# EAGLE board smd_circuit_2x5 (EAGLE 5.11)
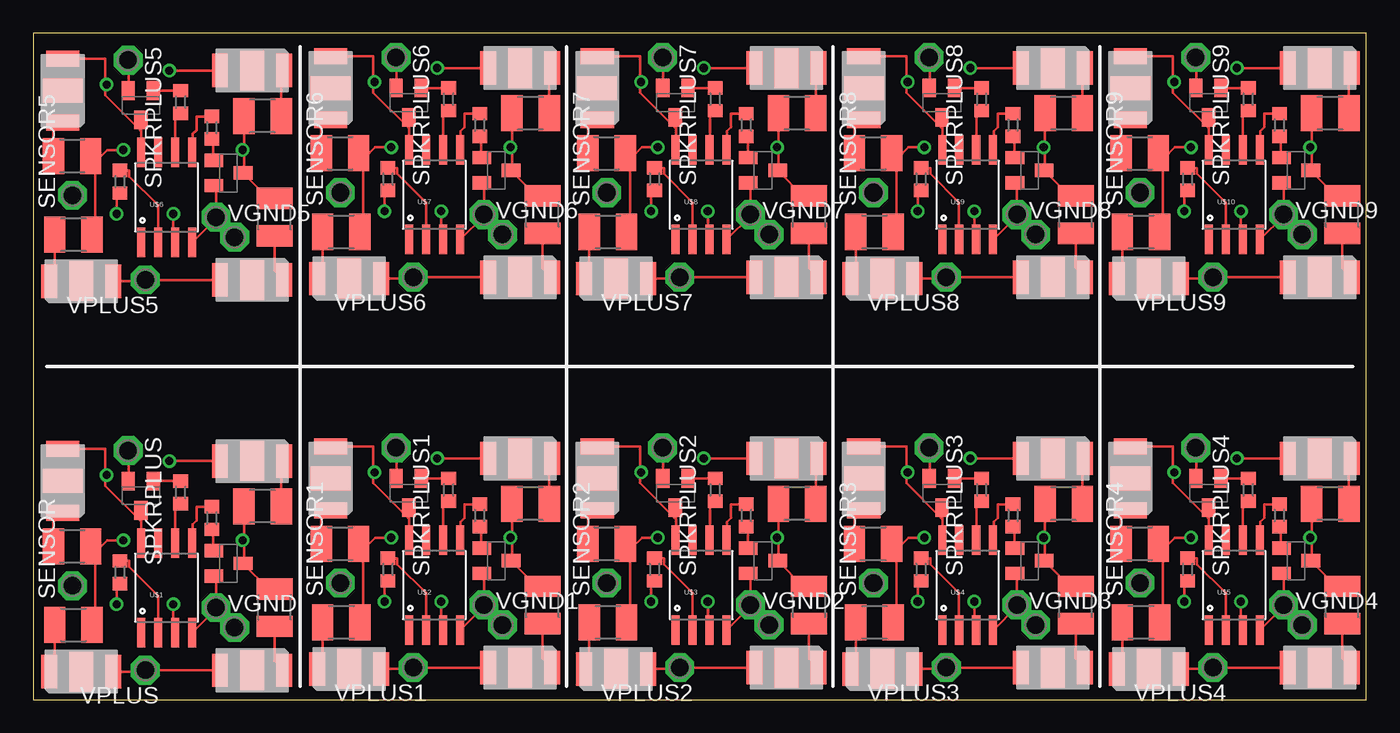
[diagram p0: board, top side]
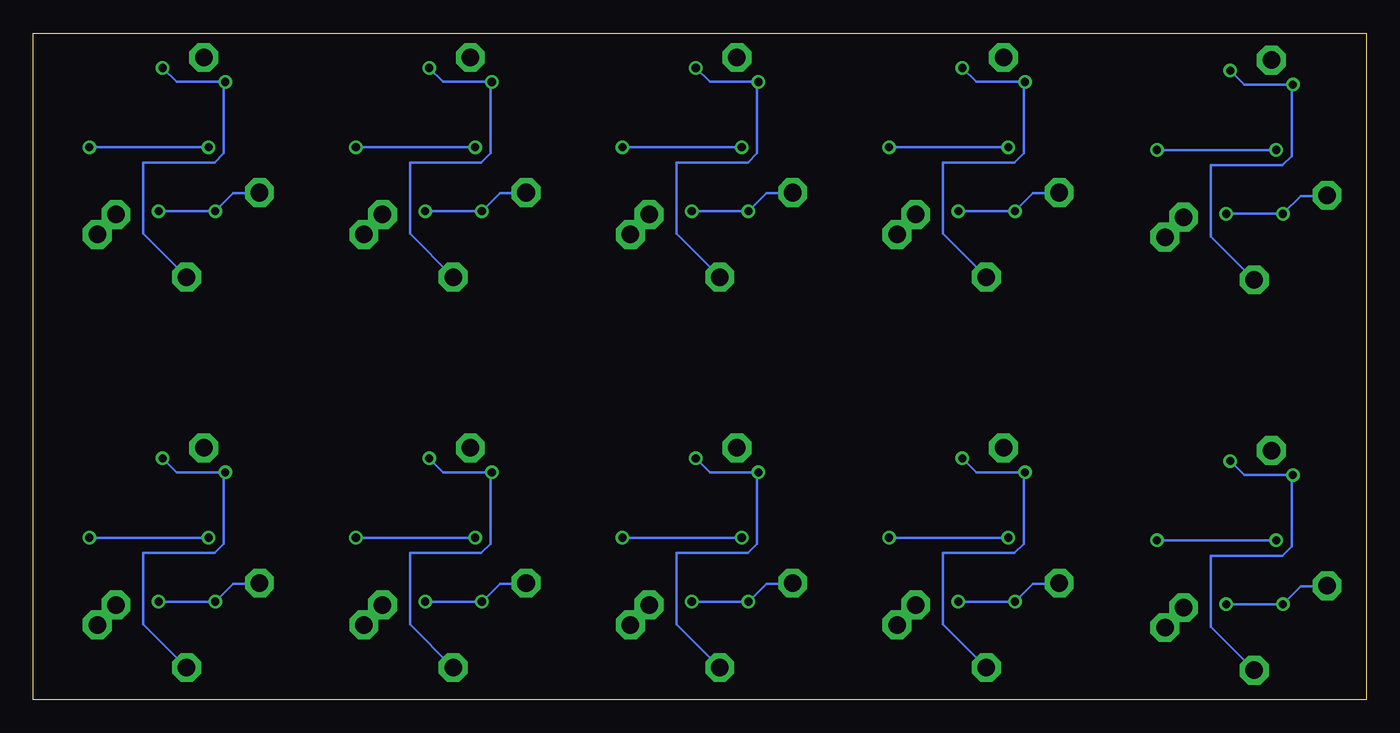
[diagram p1: board, bottom side, seen from below]

Size 100 x 50 mm. Coordinates in mm from the lower left corner, seen from the top.
Outline: 0,0 100,0 100,50 0,50 0,0
Copper layers (1*16): Top 0.035mm / dielectric 1.5mm / Bottom 0.035mm
Design rules "default *": minimum track width 8mil, minimum drill 24mil, track to track 20mil, track to pad 20mil, pad to pad 20mil, via to via 20mil, smd to smd 20mil, copper to edge 7mil, drill to drill 8mil, minimum pad ring 10mil, minimum via ring 8mil, stop-mask expansion 4mil, vias tented up to drill 0mil, thermal gap 10mil

## Footprints (pad centres in the part's own frame; a part is rotated, then mirrored left to right if it is on the bottom)
OPTEK-DURIS5 = smd 2.5 x 1.2: ANODE 0,-2.4; CATHODE 0,2.4 | smd 3 x 1.8: P$5 0,0
R0603 = smd 1 x 1.1: 1 -0.85,0; 2 0.85,0
R1210 = smd 1.6 x 2.7: 1 -1.4,0; 2 1.4,0
P1-13 = drill 1.321 pad 2.159 octagon: TP 0,0
SOT23-BEC = smd 1 x 1.4: B -0.95,-1.1; C 0,1.1; E 0.95,-1.1
SO08-EIAJ = smd 0.61 x 2.21: 1 -1.905,-3.378; 2 -0.635,-3.378; 3 0.635,-3.378; 4 1.905,-3.378; 5 1.905,3.353; 6 0.635,3.353; 7 -0.635,3.353; 8 -1.905,3.353

## Placement (x,y rotation side)
LED1  [OPTEK-DURIS5]  16.4,17.9 270 top
LED2  [OPTEK-DURIS5]  16.4,2.2 270 top
LED3  [OPTEK-DURIS5]  3.6,2.1 90 top
LED4  [OPTEK-DURIS5]  2.2,16.4 180 top
LED5  [OPTEK-DURIS5]  36.5,18.1 270 top
LED6  [OPTEK-DURIS5]  36.5,2.4 270 top
LED7  [OPTEK-DURIS5]  23.7,2.3 90 top
LED8  [OPTEK-DURIS5]  22.3,16.6 180 top
LED9  [OPTEK-DURIS5]  56.5,18.1 270 top
LED10  [OPTEK-DURIS5]  56.5,2.4 270 top
LED11  [OPTEK-DURIS5]  43.7,2.3 90 top
LED12  [OPTEK-DURIS5]  42.3,16.6 180 top
LED13  [OPTEK-DURIS5]  76.5,18.1 270 top
LED14  [OPTEK-DURIS5]  76.5,2.4 270 top
LED15  [OPTEK-DURIS5]  63.7,2.3 90 top
LED16  [OPTEK-DURIS5]  62.3,16.6 180 top
LED17  [OPTEK-DURIS5]  96.5,18.1 270 top
LED18  [OPTEK-DURIS5]  96.5,2.4 270 top
LED19  [OPTEK-DURIS5]  83.7,2.3 90 top
LED20  [OPTEK-DURIS5]  82.3,16.6 180 top
LED21  [OPTEK-DURIS5]  16.4,47.2 270 top
LED22  [OPTEK-DURIS5]  16.4,31.5 270 top
LED23  [OPTEK-DURIS5]  3.6,31.4 90 top
LED24  [OPTEK-DURIS5]  2.2,45.7 180 top
LED25  [OPTEK-DURIS5]  36.5,47.4 270 top
LED26  [OPTEK-DURIS5]  36.5,31.7 270 top
LED27  [OPTEK-DURIS5]  23.7,31.6 90 top
LED28  [OPTEK-DURIS5]  22.3,45.9 180 top
LED29  [OPTEK-DURIS5]  56.5,47.4 270 top
LED30  [OPTEK-DURIS5]  56.5,31.7 270 top
LED31  [OPTEK-DURIS5]  43.7,31.6 90 top
LED32  [OPTEK-DURIS5]  42.3,45.9 180 top
LED33  [OPTEK-DURIS5]  76.5,47.4 270 top
LED34  [OPTEK-DURIS5]  76.5,31.7 270 top
LED35  [OPTEK-DURIS5]  63.7,31.6 90 top
LED36  [OPTEK-DURIS5]  62.3,45.9 180 top
LED37  [OPTEK-DURIS5]  96.5,47.4 270 top
LED38  [OPTEK-DURIS5]  96.5,31.7 270 top
LED39  [OPTEK-DURIS5]  83.7,31.6 90 top
LED40  [OPTEK-DURIS5]  82.3,45.9 180 top
R1  [R0603]  13.4,13.61 270 top
R2  [R0603]  11.05,15.55 90 top
R3  [R0603]  6.51,9.56 90 top
R4  [R1210]  17.2,14.5 180 top
R5  [R1210]  18.1,6.9 90 top
R6  [R1210]  3,5.6 0 top
R7  [R1210]  2.9,11.5 0 top
R8  [R0603]  33.5,13.81 270 top
R9  [R0603]  31.15,15.75 90 top
R10  [R0603]  26.61,9.76 90 top
R11  [R1210]  37.3,14.7 180 top
R12  [R1210]  38.2,7.1 90 top
R13  [R1210]  23.1,5.8 0 top
R14  [R1210]  23,11.7 0 top
R15  [R0603]  53.5,13.81 270 top
R16  [R0603]  51.15,15.75 90 top
R17  [R0603]  46.61,9.76 90 top
R18  [R1210]  57.3,14.7 180 top
R19  [R1210]  58.2,7.1 90 top
R20  [R1210]  43.1,5.8 0 top
R21  [R1210]  43,11.7 0 top
R22  [R0603]  73.5,13.81 270 top
R23  [R0603]  71.15,15.75 90 top
R24  [R0603]  66.61,9.76 90 top
R25  [R1210]  77.3,14.7 180 top
R26  [R1210]  78.2,7.1 90 top
R27  [R1210]  63.1,5.8 0 top
R28  [R1210]  63,11.7 0 top
R29  [R0603]  93.5,13.81 270 top
R30  [R0603]  91.15,15.75 90 top
R31  [R0603]  86.61,9.76 90 top
R32  [R1210]  97.3,14.7 180 top
R33  [R1210]  98.2,7.1 90 top
R34  [R1210]  83.1,5.8 0 top
R35  [R1210]  83,11.7 0 top
R36  [R0603]  13.4,42.91 270 top
R37  [R0603]  11.05,44.85 90 top
R38  [R0603]  6.51,38.86 90 top
R39  [R1210]  17.2,43.8 180 top
R40  [R1210]  18.1,36.2 90 top
R41  [R1210]  3,34.9 0 top
R42  [R1210]  2.9,40.8 0 top
R43  [R0603]  33.5,43.11 270 top
R44  [R0603]  31.15,45.05 90 top
R45  [R0603]  26.61,39.06 90 top
R46  [R1210]  37.3,44 180 top
R47  [R1210]  38.2,36.4 90 top
R48  [R1210]  23.1,35.1 0 top
R49  [R1210]  23,41 0 top
R50  [R0603]  53.5,43.11 270 top
R51  [R0603]  51.15,45.05 90 top
R52  [R0603]  46.61,39.06 90 top
R53  [R1210]  57.3,44 180 top
R54  [R1210]  58.2,36.4 90 top
R55  [R1210]  43.1,35.1 0 top
R56  [R1210]  43,41 0 top
R57  [R0603]  73.5,43.11 270 top
R58  [R0603]  71.15,45.05 90 top
R59  [R0603]  66.61,39.06 90 top
R60  [R1210]  77.3,44 180 top
R61  [R1210]  78.2,36.4 90 top
R62  [R1210]  63.1,35.1 0 top
R63  [R1210]  63,41 0 top
R64  [R0603]  93.5,43.11 270 top
R65  [R0603]  91.15,45.05 90 top
R66  [R0603]  86.61,39.06 90 top
R67  [R1210]  97.3,44 180 top
R68  [R1210]  98.2,36.4 90 top
R69  [R1210]  83.1,35.1 0 top
R70  [R1210]  83,41 0 top
SENSOR  PTR1PAD1-13  [P1-13]  2.93,8.54 90 top
SENSOR1  PTR1PAD1-13  [P1-13]  23.03,8.74 90 top
SENSOR2  PTR1PAD1-13  [P1-13]  43.03,8.74 90 top
SENSOR3  PTR1PAD1-13  [P1-13]  63.03,8.74 90 top
SENSOR4  PTR1PAD1-13  [P1-13]  83.03,8.74 90 top
SENSOR5  PTR1PAD1-13  [P1-13]  2.93,37.84 90 top
SENSOR6  PTR1PAD1-13  [P1-13]  23.03,38.04 90 top
SENSOR7  PTR1PAD1-13  [P1-13]  43.03,38.04 90 top
SENSOR8  PTR1PAD1-13  [P1-13]  63.03,38.04 90 top
SENSOR9  PTR1PAD1-13  [P1-13]  83.03,38.04 90 top
SPKRGND  PTR1PAD1-13  [P1-13]  15.1,5.4 0 top
SPKRGND1  PTR1PAD1-13  [P1-13]  35.2,5.6 0 top
SPKRGND2  PTR1PAD1-13  [P1-13]  55.2,5.6 0 top
SPKRGND3  PTR1PAD1-13  [P1-13]  75.2,5.6 0 top
SPKRGND4  PTR1PAD1-13  [P1-13]  95.2,5.6 0 top
SPKRGND5  PTR1PAD1-13  [P1-13]  15.1,34.7 0 top
SPKRGND6  PTR1PAD1-13  [P1-13]  35.2,34.9 0 top
SPKRGND7  PTR1PAD1-13  [P1-13]  55.2,34.9 0 top
SPKRGND8  PTR1PAD1-13  [P1-13]  75.2,34.9 0 top
SPKRGND9  PTR1PAD1-13  [P1-13]  95.2,34.9 0 top
SPKRPLUS  PTR1PAD1-13  [P1-13]  7.11,18.69 270 top
SPKRPLUS1  PTR1PAD1-13  [P1-13]  27.21,18.89 270 top
SPKRPLUS2  PTR1PAD1-13  [P1-13]  47.21,18.89 270 top
SPKRPLUS3  PTR1PAD1-13  [P1-13]  67.21,18.89 270 top
SPKRPLUS4  PTR1PAD1-13  [P1-13]  87.21,18.89 270 top
SPKRPLUS5  PTR1PAD1-13  [P1-13]  7.11,47.99 270 top
SPKRPLUS6  PTR1PAD1-13  [P1-13]  27.21,48.19 270 top
SPKRPLUS7  PTR1PAD1-13  [P1-13]  47.21,48.19 270 top
SPKRPLUS8  PTR1PAD1-13  [P1-13]  67.21,48.19 270 top
SPKRPLUS9  PTR1PAD1-13  [P1-13]  87.21,48.19 270 top
T1  [SOT23-BEC]  14.64,10.21 270 top
T2  [SOT23-BEC]  8.07,15.3 180 top
T3  [SOT23-BEC]  34.74,10.41 270 top
T4  [SOT23-BEC]  28.17,15.5 180 top
T5  [SOT23-BEC]  54.74,10.41 270 top
T6  [SOT23-BEC]  48.17,15.5 180 top
T7  [SOT23-BEC]  74.74,10.41 270 top
T8  [SOT23-BEC]  68.17,15.5 180 top
T9  [SOT23-BEC]  94.74,10.41 270 top
T10  [SOT23-BEC]  88.17,15.5 180 top
T11  [SOT23-BEC]  14.64,39.51 270 top
T12  [SOT23-BEC]  8.07,44.6 180 top
T13  [SOT23-BEC]  34.74,39.71 270 top
T14  [SOT23-BEC]  28.17,44.8 180 top
T15  [SOT23-BEC]  54.74,39.71 270 top
T16  [SOT23-BEC]  48.17,44.8 180 top
T17  [SOT23-BEC]  74.74,39.71 270 top
T18  [SOT23-BEC]  68.17,44.8 180 top
T19  [SOT23-BEC]  94.74,39.71 270 top
T20  [SOT23-BEC]  88.17,44.8 180 top
U$1  ATTINY45  [SO08-EIAJ]  10,8.4 0 top
U$2  ATTINY45  [SO08-EIAJ]  30.1,8.6 0 top
U$3  ATTINY45  [SO08-EIAJ]  50.1,8.6 0 top
U$4  ATTINY45  [SO08-EIAJ]  70.1,8.6 0 top
U$5  ATTINY45  [SO08-EIAJ]  90.1,8.6 0 top
U$6  ATTINY45  [SO08-EIAJ]  10,37.7 0 top
U$7  ATTINY45  [SO08-EIAJ]  30.1,37.9 0 top
U$8  ATTINY45  [SO08-EIAJ]  50.1,37.9 0 top
U$9  ATTINY45  [SO08-EIAJ]  70.1,37.9 0 top
U$10  ATTINY45  [SO08-EIAJ]  90.1,37.9 0 top
VGND  PTR1PAD1-13  [P1-13]  13.7,6.9 0 top
VGND1  PTR1PAD1-13  [P1-13]  33.8,7.1 0 top
VGND2  PTR1PAD1-13  [P1-13]  53.8,7.1 0 top
VGND3  PTR1PAD1-13  [P1-13]  73.8,7.1 0 top
VGND4  PTR1PAD1-13  [P1-13]  93.8,7.1 0 top
VGND5  PTR1PAD1-13  [P1-13]  13.7,36.2 0 top
VGND6  PTR1PAD1-13  [P1-13]  33.8,36.4 0 top
VGND7  PTR1PAD1-13  [P1-13]  53.8,36.4 0 top
VGND8  PTR1PAD1-13  [P1-13]  73.8,36.4 0 top
VGND9  PTR1PAD1-13  [P1-13]  93.8,36.4 0 top
VPLUS  PTR1PAD1-13  [P1-13]  8.4,2.2 180 top
VPLUS1  PTR1PAD1-13  [P1-13]  28.5,2.4 180 top
VPLUS2  PTR1PAD1-13  [P1-13]  48.5,2.4 180 top
VPLUS3  PTR1PAD1-13  [P1-13]  68.5,2.4 180 top
VPLUS4  PTR1PAD1-13  [P1-13]  88.5,2.4 180 top
VPLUS5  PTR1PAD1-13  [P1-13]  8.4,31.5 180 top
VPLUS6  PTR1PAD1-13  [P1-13]  28.5,31.7 180 top
VPLUS7  PTR1PAD1-13  [P1-13]  48.5,31.7 180 top
VPLUS8  PTR1PAD1-13  [P1-13]  68.5,31.7 180 top
VPLUS9  PTR1PAD1-13  [P1-13]  88.5,31.7 180 top

## Library data of the parts
LED1-LED40 T1-T20 = smd_parts
R1-R70 = rcl
SENSOR SENSOR1-SENSOR9 SPKRGND SPKRGND1-SPKRGND9 SPKRPLUS SPKRPLUS1-SPKRPLUS9 VGND VGND1-VGND9 VPLUS VPLUS1-VPLUS9 = testpad
U$1-U$10 = SparkFun

## Nets
+5V: LED1.ANODE LED2.ANODE LED3.ANODE LED4.ANODE T2.C U$1.8 VPLUS.TP
+5V1: LED5.ANODE LED6.ANODE LED7.ANODE LED8.ANODE T4.C U$2.8 VPLUS1.TP
+5V2: LED9.ANODE LED10.ANODE LED11.ANODE LED12.ANODE T6.C U$3.8 VPLUS2.TP
+5V3: LED13.ANODE LED14.ANODE LED15.ANODE LED16.ANODE T8.C U$4.8 VPLUS3.TP
+5V4: LED17.ANODE LED18.ANODE LED19.ANODE LED20.ANODE T10.C U$5.8 VPLUS4.TP
+5V5: LED21.ANODE LED22.ANODE LED23.ANODE LED24.ANODE T12.C U$6.8 VPLUS5.TP
+5V6: LED25.ANODE LED26.ANODE LED27.ANODE LED28.ANODE T14.C U$7.8 VPLUS6.TP
+5V7: LED29.ANODE LED30.ANODE LED31.ANODE LED32.ANODE T16.C U$8.8 VPLUS7.TP
+5V8: LED33.ANODE LED34.ANODE LED35.ANODE LED36.ANODE T18.C U$9.8 VPLUS8.TP
+5V9: LED37.ANODE LED38.ANODE LED39.ANODE LED40.ANODE T20.C U$10.8 VPLUS9.TP
GNDA: SPKRGND.TP T1.E U$1.4 VGND.TP
GNDA1: SPKRGND1.TP T3.E U$2.4 VGND1.TP
GNDA2: SPKRGND2.TP T5.E U$3.4 VGND2.TP
GNDA3: SPKRGND3.TP T7.E U$4.4 VGND3.TP
GNDA4: SPKRGND4.TP T9.E U$5.4 VGND4.TP
GNDA5: SPKRGND5.TP T11.E U$6.4 VGND5.TP
GNDA6: SPKRGND6.TP T13.E U$7.4 VGND6.TP
GNDA7: SPKRGND7.TP T15.E U$8.4 VGND7.TP
GNDA8: SPKRGND8.TP T17.E U$9.4 VGND8.TP
GNDA9: SPKRGND9.TP T19.E U$10.4 VGND9.TP
N$1: R3.2 U$1.2
N$2: R10.2 U$2.2
N$3: R2.1 U$1.6
N$4: R2.2 T2.B
N$5: R4.2 R5.2 R6.2 R7.2 T1.C
N$6: R1.2 T1.B
N$7: R1.1 U$1.5
N$8: SPKRPLUS.TP T2.E
N$9: LED1.CATHODE R4.1
N$10: LED2.CATHODE R5.1
N$11: LED3.CATHODE R6.1
N$12: LED4.CATHODE R7.1
N$13: R9.1 U$2.6
N$14: R8.1 U$2.5
N$15: R9.2 T4.B
N$16: SPKRPLUS1.TP T4.E
N$17: LED5.CATHODE R11.1
N$18: LED6.CATHODE R12.1
N$19: R3.1 SENSOR.TP U$1.3
N$20: LED7.CATHODE R13.1
N$21: LED8.CATHODE R14.1
N$22: R8.2 T3.B
N$23: R11.2 R12.2 R13.2 R14.2 T3.C
N$24: R10.1 SENSOR1.TP U$2.3
N$25: R17.2 U$3.2
N$26: R16.1 U$3.6
N$27: R15.1 U$3.5
N$28: R16.2 T6.B
N$29: SPKRPLUS2.TP T6.E
N$30: LED9.CATHODE R18.1
N$31: LED10.CATHODE R19.1
N$32: LED11.CATHODE R20.1
N$33: LED12.CATHODE R21.1
N$34: R15.2 T5.B
N$35: R18.2 R19.2 R20.2 R21.2 T5.C
N$36: R17.1 SENSOR2.TP U$3.3
N$37: R24.2 U$4.2
N$38: R23.1 U$4.6
N$39: R22.1 U$4.5
N$40: R23.2 T8.B
N$41: SPKRPLUS3.TP T8.E
N$42: LED13.CATHODE R25.1
N$43: LED14.CATHODE R26.1
N$44: LED15.CATHODE R27.1
N$45: LED16.CATHODE R28.1
N$46: R22.2 T7.B
N$47: R25.2 R26.2 R27.2 R28.2 T7.C
N$48: R24.1 SENSOR3.TP U$4.3
N$49: R31.2 U$5.2
N$50: R30.1 U$5.6
N$51: R29.1 U$5.5
N$52: R30.2 T10.B
N$53: SPKRPLUS4.TP T10.E
N$54: LED17.CATHODE R32.1
N$55: LED18.CATHODE R33.1
N$56: LED19.CATHODE R34.1
N$57: LED20.CATHODE R35.1
N$58: R29.2 T9.B
N$59: R32.2 R33.2 R34.2 R35.2 T9.C
N$60: R31.1 SENSOR4.TP U$5.3
N$61: R38.2 U$6.2
N$62: R37.1 U$6.6
N$63: R36.1 U$6.5
N$64: R37.2 T12.B
N$65: SPKRPLUS5.TP T12.E
N$66: LED21.CATHODE R39.1
N$67: LED22.CATHODE R40.1
N$68: LED23.CATHODE R41.1
N$69: LED24.CATHODE R42.1
N$70: R36.2 T11.B
N$71: R39.2 R40.2 R41.2 R42.2 T11.C
N$72: R38.1 SENSOR5.TP U$6.3
N$73: R45.2 U$7.2
N$74: R44.1 U$7.6
N$75: R43.1 U$7.5
N$76: R44.2 T14.B
N$77: SPKRPLUS6.TP T14.E
N$78: LED25.CATHODE R46.1
N$79: LED26.CATHODE R47.1
N$80: LED27.CATHODE R48.1
N$81: LED28.CATHODE R49.1
N$82: R43.2 T13.B
N$83: R46.2 R47.2 R48.2 R49.2 T13.C
N$84: R45.1 SENSOR6.TP U$7.3
N$85: R52.2 U$8.2
N$86: R51.1 U$8.6
N$87: R50.1 U$8.5
N$88: R51.2 T16.B
N$89: SPKRPLUS7.TP T16.E
N$90: LED29.CATHODE R53.1
N$91: LED30.CATHODE R54.1
N$92: LED31.CATHODE R55.1
N$93: LED32.CATHODE R56.1
N$94: R50.2 T15.B
N$95: R53.2 R54.2 R55.2 R56.2 T15.C
N$96: R52.1 SENSOR7.TP U$8.3
N$97: R59.2 U$9.2
N$98: R58.1 U$9.6
N$99: R57.1 U$9.5
N$100: R58.2 T18.B
N$101: SPKRPLUS8.TP T18.E
N$102: LED33.CATHODE R60.1
N$103: LED34.CATHODE R61.1
N$104: LED35.CATHODE R62.1
N$105: LED36.CATHODE R63.1
N$106: R57.2 T17.B
N$107: R60.2 R61.2 R62.2 R63.2 T17.C
N$108: R59.1 SENSOR8.TP U$9.3
N$109: R66.2 U$10.2
N$110: R65.1 U$10.6
N$111: R64.1 U$10.5
N$112: R65.2 T20.B
N$113: SPKRPLUS9.TP T20.E
N$114: LED37.CATHODE R67.1
N$115: LED38.CATHODE R68.1
N$116: LED39.CATHODE R69.1
N$117: LED40.CATHODE R70.1
N$118: R64.2 T19.B
N$119: R67.2 R68.2 R69.2 R70.2 T19.C
N$120: R66.1 SENSOR9.TP U$10.3

## Tracks (layer width: path | path; a pad name or v marks a point on that pad's centre or on a via)
+5V  (via drill 0.61)
  Top 0.203: LED3.ANODE 8.4,2.1 VPLUS.TP LED2.ANODE | 8.1,13.45 8.1,11.8 U$1.8 | 8.1,13.45 8.1,14.15 T2.C | LED4.ANODE 5.4,18.8 5.4,16.85 | 5.4,16.85 5.4,16.05 8,13.45 8.1,13.45 | v10.2,17.9 LED1.ANODE | v5.5,16.85 5.4,16.85
  Bottom 0.203: v10.2,17.9 9.15,16.85 v5.5,16.85 5.6,16.75 5.6,11.5 6.3,10.8 11.65,10.8 11.65,5.45 VPLUS.TP
+5V1  (via drill 0.61)
  Top 0.203: LED7.ANODE 28.5,2.3 VPLUS1.TP LED6.ANODE | 28.2,13.65 28.2,12 U$2.8 | 28.2,13.65 28.2,14.35 T4.C | LED8.ANODE 25.5,19 25.5,17.05 | 25.5,17.05 25.5,16.25 28.1,13.65 28.2,13.65 | v30.3,18.1 LED5.ANODE | v25.6,17.05 25.5,17.05
  Bottom 0.203: v30.3,18.1 29.25,17.05 v25.6,17.05 25.7,16.95 25.7,11.7 26.4,11 31.75,11 31.75,5.65 VPLUS1.TP
+5V2  (via drill 0.61)
  Top 0.203: LED11.ANODE 48.5,2.3 VPLUS2.TP LED10.ANODE | 48.2,13.65 48.2,12 U$3.8 | 48.2,13.65 48.2,14.35 T6.C | LED12.ANODE 45.5,19 45.5,17.05 | 45.5,17.05 45.5,16.25 48.1,13.65 48.2,13.65 | v50.3,18.1 LED9.ANODE | v45.6,17.05 45.5,17.05
  Bottom 0.203: v50.3,18.1 49.25,17.05 v45.6,17.05 45.7,16.95 45.7,11.7 46.4,11 51.75,11 51.75,5.65 VPLUS2.TP
+5V3  (via drill 0.61)
  Top 0.203: LED15.ANODE 68.5,2.3 VPLUS3.TP LED14.ANODE | 68.2,13.65 68.2,12 U$4.8 | 68.2,13.65 68.2,14.35 T8.C | LED16.ANODE 65.5,19 65.5,17.05 | 65.5,17.05 65.5,16.25 68.1,13.65 68.2,13.65 | v70.3,18.1 LED13.ANODE | v65.6,17.05 65.5,17.05
  Bottom 0.203: v70.3,18.1 69.25,17.05 v65.6,17.05 65.7,16.95 65.7,11.7 66.4,11 71.75,11 71.75,5.65 VPLUS3.TP
+5V4  (via drill 0.61)
  Top 0.203: LED19.ANODE 88.5,2.3 VPLUS4.TP LED18.ANODE | 88.2,13.65 88.2,12 U$5.8 | 88.2,13.65 88.2,14.35 T10.C | LED20.ANODE 85.5,19 85.5,17.05 | 85.5,17.05 85.5,16.25 88.1,13.65 88.2,13.65 | v90.3,18.1 LED17.ANODE | v85.6,17.05 85.5,17.05
  Bottom 0.203: v90.3,18.1 89.25,17.05 v85.6,17.05 85.7,16.95 85.7,11.7 86.4,11 91.75,11 91.75,5.65 VPLUS4.TP
+5V5  (via drill 0.61)
  Top 0.203: LED23.ANODE 8.4,31.4 VPLUS5.TP LED22.ANODE | 8.1,42.75 8.1,41.1 U$6.8 | 8.1,42.75 8.1,43.45 T12.C | LED24.ANODE 5.4,48.1 5.4,46.15 | 5.4,46.15 5.4,45.35 8,42.75 8.1,42.75 | v10.2,47.2 LED21.ANODE | v5.5,46.15 5.4,46.15
  Bottom 0.203: v10.2,47.2 9.15,46.15 v5.5,46.15 5.6,46.05 5.6,40.8 6.3,40.1 11.65,40.1 11.65,34.75 VPLUS5.TP
+5V6  (via drill 0.61)
  Top 0.203: LED27.ANODE 28.5,31.6 VPLUS6.TP LED26.ANODE | 28.2,42.95 28.2,41.3 U$7.8 | 28.2,42.95 28.2,43.65 T14.C | LED28.ANODE 25.5,48.3 25.5,46.35 | 25.5,46.35 25.5,45.55 28.1,42.95 28.2,42.95 | v30.3,47.4 LED25.ANODE | v25.6,46.35 25.5,46.35
  Bottom 0.203: v30.3,47.4 29.25,46.35 v25.6,46.35 25.7,46.25 25.7,41 26.4,40.3 31.75,40.3 31.75,34.95 VPLUS6.TP
+5V7  (via drill 0.61)
  Top 0.203: LED31.ANODE 48.5,31.6 VPLUS7.TP LED30.ANODE | 48.2,42.95 48.2,41.3 U$8.8 | 48.2,42.95 48.2,43.65 T16.C | LED32.ANODE 45.5,48.3 45.5,46.35 | 45.5,46.35 45.5,45.55 48.1,42.95 48.2,42.95 | v50.3,47.4 LED29.ANODE | v45.6,46.35 45.5,46.35
  Bottom 0.203: v50.3,47.4 49.25,46.35 v45.6,46.35 45.7,46.25 45.7,41 46.4,40.3 51.75,40.3 51.75,34.95 VPLUS7.TP
+5V8  (via drill 0.61)
  Top 0.203: LED35.ANODE 68.5,31.6 VPLUS8.TP LED34.ANODE | 68.2,42.95 68.2,41.3 U$9.8 | 68.2,42.95 68.2,43.65 T18.C | LED36.ANODE 65.5,48.3 65.5,46.35 | 65.5,46.35 65.5,45.55 68.1,42.95 68.2,42.95 | v70.3,47.4 LED33.ANODE | v65.6,46.35 65.5,46.35
  Bottom 0.203: v70.3,47.4 69.25,46.35 v65.6,46.35 65.7,46.25 65.7,41 66.4,40.3 71.75,40.3 71.75,34.95 VPLUS8.TP
+5V9  (via drill 0.61)
  Top 0.203: LED39.ANODE 88.5,31.6 VPLUS9.TP LED38.ANODE | 88.2,42.95 88.2,41.3 U$10.8 | 88.2,42.95 88.2,43.65 T20.C | LED40.ANODE 85.5,48.3 85.5,46.35 | 85.5,46.35 85.5,45.55 88.1,42.95 88.2,42.95 | v90.3,47.4 LED37.ANODE | v85.6,46.35 85.5,46.35
  Bottom 0.203: v90.3,47.4 89.25,46.35 v85.6,46.35 85.7,46.25 85.7,41 86.4,40.3 91.75,40.3 91.75,34.95 VPLUS9.TP
GNDA
  Top 0.203: VGND.TP 13.7,9.1 T1.E | U$1.4 11.95,5.05 13.7,6.8 VGND.TP | SPKRGND.TP 13.75,6.75 VGND.TP
GNDA1
  Top 0.203: VGND1.TP 33.8,9.3 T3.E | U$2.4 32.05,5.25 33.8,7 VGND1.TP | SPKRGND1.TP 33.85,6.95 VGND1.TP
GNDA2
  Top 0.203: VGND2.TP 53.8,9.3 T5.E | U$3.4 52.05,5.25 53.8,7 VGND2.TP | SPKRGND2.TP 53.85,6.95 VGND2.TP
GNDA3
  Top 0.203: VGND3.TP 73.8,9.3 T7.E | U$4.4 72.05,5.25 73.8,7 VGND3.TP | SPKRGND3.TP 73.85,6.95 VGND3.TP
GNDA4
  Top 0.203: VGND4.TP 93.8,9.3 T9.E | U$5.4 92.05,5.25 93.8,7 VGND4.TP | SPKRGND4.TP 93.85,6.95 VGND4.TP
GNDA5
  Top 0.203: VGND5.TP 13.7,38.4 T11.E | U$6.4 11.95,34.35 13.7,36.1 VGND5.TP | SPKRGND5.TP 13.75,36.05 VGND5.TP
GNDA6
  Top 0.203: VGND6.TP 33.8,38.6 T13.E | U$7.4 32.05,34.55 33.8,36.3 VGND6.TP | SPKRGND6.TP 33.85,36.25 VGND6.TP
GNDA7
  Top 0.203: VGND7.TP 53.8,38.6 T15.E | U$8.4 52.05,34.55 53.8,36.3 VGND7.TP | SPKRGND7.TP 53.85,36.25 VGND7.TP
GNDA8
  Top 0.203: VGND8.TP 73.8,38.6 T17.E | U$9.4 72.05,34.55 73.8,36.3 VGND8.TP | SPKRGND8.TP 73.85,36.25 VGND8.TP
GNDA9
  Top 0.203: VGND9.TP 93.8,38.6 T19.E | U$10.4 92.05,34.55 93.8,36.3 VGND9.TP | SPKRGND9.TP 93.85,36.25 VGND9.TP
N$1
  Top 0.203: R3.2 6.55,10.4 7.2,10.4 7.2,9.95 9.35,7.8 9.35,5.05 U$1.2
N$2
  Top 0.203: R10.2 26.65,10.6 27.3,10.6 27.3,10.15 29.45,8 29.45,5.25 U$2.2
N$3
  Top 0.203: R2.1 11.05,14.65 10.65,14.25 10.65,11.8 U$1.6
N$4
  Top 0.203: R2.2 9.05,16.4 T2.B
N$5  (via drill 0.61)
  Top 0.203: R6.2 4.65,5.85 4.65,11.15 R7.2 4.75,11.15 5.55,11.95 v6.75,11.95 | R5.2 17.65,8.3 T1.C 15.8,10.3 15.8,11.95 | 15.8,11.95 R4.2 | v15.7,11.95 15.8,11.95
  Bottom 0.203: v6.75,11.95 v15.7,11.95
N$6
  Top 0.203: R1.2 13.5,12.65 13.5,11.2 T1.B
N$7
  Top 0.203: R1.1 13.35,14.45 12.25,14.45 12.25,13.45 11.95,13.15 11.95,11.8 U$1.5
N$8
  Top 0.203: T2.E 7.15,16.4 7.15,18.55 SPKRPLUS.TP
N$9
  Top 0.203: LED1.CATHODE 18.6,17.7 R4.1
N$10
  Top 0.203: LED2.CATHODE 18.1,2.9 R5.1
N$11
  Top 0.203: LED3.CATHODE 1.6,2.5 R6.1
N$12
  Top 0.203: LED4.CATHODE 1.5,13.3 R7.1
N$13
  Top 0.203: R9.1 31.15,14.85 30.75,14.45 30.75,12 U$2.6
N$14
  Top 0.203: R8.1 33.45,14.65 32.35,14.65 32.35,13.65 32.05,13.35 32.05,12 U$2.5
N$15
  Top 0.203: R9.2 29.15,16.6 T4.B
N$16
  Top 0.203: T4.E 27.25,16.6 27.25,18.75 SPKRPLUS1.TP
N$17
  Top 0.203: LED5.CATHODE 38.7,17.9 R11.1
N$18
  Top 0.203: LED6.CATHODE 38.2,3.1 R12.1
N$19  (via drill 0.61)
  Top 0.203: v6.25,7.15 6.25,8.45 R3.1 | v10.5,7.15 10.5,5.15 10.6,5.05 U$1.3
  Bottom 0.203: SENSOR.TP 2.95,8.5 4.9,8.5 v6.25,7.15 v10.5,7.15
N$20
  Top 0.203: LED7.CATHODE 21.7,2.7 R13.1
N$21
  Top 0.203: LED8.CATHODE 21.6,13.5 R14.1
N$22
  Top 0.203: R8.2 33.6,12.85 33.6,11.4 T3.B
N$23  (via drill 0.61)
  Top 0.203: R13.2 24.75,6.05 24.75,11.35 R14.2 24.85,11.35 25.65,12.15 v26.85,12.15 | R12.2 37.75,8.5 T3.C 35.9,10.5 35.9,12.15 | 35.9,12.15 R11.2 | v35.8,12.15 35.9,12.15
  Bottom 0.203: v26.85,12.15 v35.8,12.15
N$24  (via drill 0.61)
  Top 0.203: v26.35,7.35 26.35,8.65 R10.1 | v30.6,7.35 30.6,5.35 30.7,5.25 U$2.3
  Bottom 0.203: SENSOR1.TP 23.05,8.7 25,8.7 v26.35,7.35 v30.6,7.35
N$25
  Top 0.203: R17.2 46.65,10.6 47.3,10.6 47.3,10.15 49.45,8 49.45,5.25 U$3.2
N$26
  Top 0.203: R16.1 51.15,14.85 50.75,14.45 50.75,12 U$3.6
N$27
  Top 0.203: R15.1 53.45,14.65 52.35,14.65 52.35,13.65 52.05,13.35 52.05,12 U$3.5
N$28
  Top 0.203: R16.2 49.15,16.6 T6.B
N$29
  Top 0.203: T6.E 47.25,16.6 47.25,18.75 SPKRPLUS2.TP
N$30
  Top 0.203: LED9.CATHODE 58.7,17.9 R18.1
N$31
  Top 0.203: LED10.CATHODE 58.2,3.1 R19.1
N$32
  Top 0.203: LED11.CATHODE 41.7,2.7 R20.1
N$33
  Top 0.203: LED12.CATHODE 41.6,13.5 R21.1
N$34
  Top 0.203: R15.2 53.6,12.85 53.6,11.4 T5.B
N$35  (via drill 0.61)
  Top 0.203: R20.2 44.75,6.05 44.75,11.35 R21.2 44.85,11.35 45.65,12.15 v46.85,12.15 | R19.2 57.75,8.5 T5.C 55.9,10.5 55.9,12.15 | 55.9,12.15 R18.2 | v55.8,12.15 55.9,12.15
  Bottom 0.203: v46.85,12.15 v55.8,12.15
N$36  (via drill 0.61)
  Top 0.203: v46.35,7.35 46.35,8.65 R17.1 | v50.6,7.35 50.6,5.35 50.7,5.25 U$3.3
  Bottom 0.203: SENSOR2.TP 43.05,8.7 45,8.7 v46.35,7.35 v50.6,7.35
N$37
  Top 0.203: R24.2 66.65,10.6 67.3,10.6 67.3,10.15 69.45,8 69.45,5.25 U$4.2
N$38
  Top 0.203: R23.1 71.15,14.85 70.75,14.45 70.75,12 U$4.6
N$39
  Top 0.203: R22.1 73.45,14.65 72.35,14.65 72.35,13.65 72.05,13.35 72.05,12 U$4.5
N$40
  Top 0.203: R23.2 69.15,16.6 T8.B
N$41
  Top 0.203: T8.E 67.25,16.6 67.25,18.75 SPKRPLUS3.TP
N$42
  Top 0.203: LED13.CATHODE 78.7,17.9 R25.1
N$43
  Top 0.203: LED14.CATHODE 78.2,3.1 R26.1
N$44
  Top 0.203: LED15.CATHODE 61.7,2.7 R27.1
N$45
  Top 0.203: LED16.CATHODE 61.6,13.5 R28.1
N$46
  Top 0.203: R22.2 73.6,12.85 73.6,11.4 T7.B
N$47  (via drill 0.61)
  Top 0.203: R27.2 64.75,6.05 64.75,11.35 R28.2 64.85,11.35 65.65,12.15 v66.85,12.15 | R26.2 77.75,8.5 T7.C 75.9,10.5 75.9,12.15 | 75.9,12.15 R25.2 | v75.8,12.15 75.9,12.15
  Bottom 0.203: v66.85,12.15 v75.8,12.15
N$48  (via drill 0.61)
  Top 0.203: v66.35,7.35 66.35,8.65 R24.1 | v70.6,7.35 70.6,5.35 70.7,5.25 U$4.3
  Bottom 0.203: SENSOR3.TP 63.05,8.7 65,8.7 v66.35,7.35 v70.6,7.35
N$49
  Top 0.203: R31.2 86.65,10.6 87.3,10.6 87.3,10.15 89.45,8 89.45,5.25 U$5.2
N$50
  Top 0.203: R30.1 91.15,14.85 90.75,14.45 90.75,12 U$5.6
N$51
  Top 0.203: R29.1 93.45,14.65 92.35,14.65 92.35,13.65 92.05,13.35 92.05,12 U$5.5
N$52
  Top 0.203: R30.2 89.15,16.6 T10.B
N$53
  Top 0.203: T10.E 87.25,16.6 87.25,18.75 SPKRPLUS4.TP
N$54
  Top 0.203: LED17.CATHODE 98.7,17.9 R32.1
N$55
  Top 0.203: LED18.CATHODE 98.2,3.1 R33.1
N$56
  Top 0.203: LED19.CATHODE 81.7,2.7 R34.1
N$57
  Top 0.203: LED20.CATHODE 81.6,13.5 R35.1
N$58
  Top 0.203: R29.2 93.6,12.85 93.6,11.4 T9.B
N$59  (via drill 0.61)
  Top 0.203: R34.2 84.75,6.05 84.75,11.35 R35.2 84.85,11.35 85.65,12.15 v86.85,12.15 | R33.2 97.75,8.5 T9.C 95.9,10.5 95.9,12.15 | 95.9,12.15 R32.2 | v95.8,12.15 95.9,12.15
  Bottom 0.203: v86.85,12.15 v95.8,12.15
N$60  (via drill 0.61)
  Top 0.203: v86.35,7.35 86.35,8.65 R31.1 | v90.6,7.35 90.6,5.35 90.7,5.25 U$5.3
  Bottom 0.203: SENSOR4.TP 83.05,8.7 85,8.7 v86.35,7.35 v90.6,7.35
N$61
  Top 0.203: R38.2 6.55,39.7 7.2,39.7 7.2,39.25 9.35,37.1 9.35,34.35 U$6.2
N$62
  Top 0.203: R37.1 11.05,43.95 10.65,43.55 10.65,41.1 U$6.6
N$63
  Top 0.203: R36.1 13.35,43.75 12.25,43.75 12.25,42.75 11.95,42.45 11.95,41.1 U$6.5
N$64
  Top 0.203: R37.2 9.05,45.7 T12.B
N$65
  Top 0.203: T12.E 7.15,45.7 7.15,47.85 SPKRPLUS5.TP
N$66
  Top 0.203: LED21.CATHODE 18.6,47 R39.1
N$67
  Top 0.203: LED22.CATHODE 18.1,32.2 R40.1
N$68
  Top 0.203: LED23.CATHODE 1.6,31.8 R41.1
N$69
  Top 0.203: LED24.CATHODE 1.5,42.6 R42.1
N$70
  Top 0.203: R36.2 13.5,41.95 13.5,40.5 T11.B
N$71  (via drill 0.61)
  Top 0.203: R41.2 4.65,35.15 4.65,40.45 R42.2 4.75,40.45 5.55,41.25 v6.75,41.25 | R40.2 17.65,37.6 T11.C 15.8,39.6 15.8,41.25 | 15.8,41.25 R39.2 | v15.7,41.25 15.8,41.25
  Bottom 0.203: v6.75,41.25 v15.7,41.25
N$72  (via drill 0.61)
  Top 0.203: v6.25,36.45 6.25,37.75 R38.1 | v10.5,36.45 10.5,34.45 10.6,34.35 U$6.3
  Bottom 0.203: SENSOR5.TP 2.95,37.8 4.9,37.8 v6.25,36.45 v10.5,36.45
N$73
  Top 0.203: R45.2 26.65,39.9 27.3,39.9 27.3,39.45 29.45,37.3 29.45,34.55 U$7.2
N$74
  Top 0.203: R44.1 31.15,44.15 30.75,43.75 30.75,41.3 U$7.6
N$75
  Top 0.203: R43.1 33.45,43.95 32.35,43.95 32.35,42.95 32.05,42.65 32.05,41.3 U$7.5
N$76
  Top 0.203: R44.2 29.15,45.9 T14.B
N$77
  Top 0.203: T14.E 27.25,45.9 27.25,48.05 SPKRPLUS6.TP
N$78
  Top 0.203: LED25.CATHODE 38.7,47.2 R46.1
N$79
  Top 0.203: LED26.CATHODE 38.2,32.4 R47.1
N$80
  Top 0.203: LED27.CATHODE 21.7,32 R48.1
N$81
  Top 0.203: LED28.CATHODE 21.6,42.8 R49.1
N$82
  Top 0.203: R43.2 33.6,42.15 33.6,40.7 T13.B
N$83  (via drill 0.61)
  Top 0.203: R48.2 24.75,35.35 24.75,40.65 R49.2 24.85,40.65 25.65,41.45 v26.85,41.45 | R47.2 37.75,37.8 T13.C 35.9,39.8 35.9,41.45 | 35.9,41.45 R46.2 | v35.8,41.45 35.9,41.45
  Bottom 0.203: v26.85,41.45 v35.8,41.45
N$84  (via drill 0.61)
  Top 0.203: v26.35,36.65 26.35,37.95 R45.1 | v30.6,36.65 30.6,34.65 30.7,34.55 U$7.3
  Bottom 0.203: SENSOR6.TP 23.05,38 25,38 v26.35,36.65 v30.6,36.65
N$85
  Top 0.203: R52.2 46.65,39.9 47.3,39.9 47.3,39.45 49.45,37.3 49.45,34.55 U$8.2
N$86
  Top 0.203: R51.1 51.15,44.15 50.75,43.75 50.75,41.3 U$8.6
N$87
  Top 0.203: R50.1 53.45,43.95 52.35,43.95 52.35,42.95 52.05,42.65 52.05,41.3 U$8.5
N$88
  Top 0.203: R51.2 49.15,45.9 T16.B
N$89
  Top 0.203: T16.E 47.25,45.9 47.25,48.05 SPKRPLUS7.TP
N$90
  Top 0.203: LED29.CATHODE 58.7,47.2 R53.1
N$91
  Top 0.203: LED30.CATHODE 58.2,32.4 R54.1
N$92
  Top 0.203: LED31.CATHODE 41.7,32 R55.1
N$93
  Top 0.203: LED32.CATHODE 41.6,42.8 R56.1
N$94
  Top 0.203: R50.2 53.6,42.15 53.6,40.7 T15.B
N$95  (via drill 0.61)
  Top 0.203: R55.2 44.75,35.35 44.75,40.65 R56.2 44.85,40.65 45.65,41.45 v46.85,41.45 | R54.2 57.75,37.8 T15.C 55.9,39.8 55.9,41.45 | 55.9,41.45 R53.2 | v55.8,41.45 55.9,41.45
  Bottom 0.203: v46.85,41.45 v55.8,41.45
N$96  (via drill 0.61)
  Top 0.203: v46.35,36.65 46.35,37.95 R52.1 | v50.6,36.65 50.6,34.65 50.7,34.55 U$8.3
  Bottom 0.203: SENSOR7.TP 43.05,38 45,38 v46.35,36.65 v50.6,36.65
N$97
  Top 0.203: R59.2 66.65,39.9 67.3,39.9 67.3,39.45 69.45,37.3 69.45,34.55 U$9.2
N$98
  Top 0.203: R58.1 71.15,44.15 70.75,43.75 70.75,41.3 U$9.6
N$99
  Top 0.203: R57.1 73.45,43.95 72.35,43.95 72.35,42.95 72.05,42.65 72.05,41.3 U$9.5
N$100
  Top 0.203: R58.2 69.15,45.9 T18.B
N$101
  Top 0.203: T18.E 67.25,45.9 67.25,48.05 SPKRPLUS8.TP
N$102
  Top 0.203: LED33.CATHODE 78.7,47.2 R60.1
N$103
  Top 0.203: LED34.CATHODE 78.2,32.4 R61.1
N$104
  Top 0.203: LED35.CATHODE 61.7,32 R62.1
N$105
  Top 0.203: LED36.CATHODE 61.6,42.8 R63.1
N$106
  Top 0.203: R57.2 73.6,42.15 73.6,40.7 T17.B
N$107  (via drill 0.61)
  Top 0.203: R62.2 64.75,35.35 64.75,40.65 R63.2 64.85,40.65 65.65,41.45 v66.85,41.45 | R61.2 77.75,37.8 T17.C 75.9,39.8 75.9,41.45 | 75.9,41.45 R60.2 | v75.8,41.45 75.9,41.45
  Bottom 0.203: v66.85,41.45 v75.8,41.45
N$108  (via drill 0.61)
  Top 0.203: v66.35,36.65 66.35,37.95 R59.1 | v70.6,36.65 70.6,34.65 70.7,34.55 U$9.3
  Bottom 0.203: SENSOR8.TP 63.05,38 65,38 v66.35,36.65 v70.6,36.65
N$109
  Top 0.203: R66.2 86.65,39.9 87.3,39.9 87.3,39.45 89.45,37.3 89.45,34.55 U$10.2
N$110
  Top 0.203: R65.1 91.15,44.15 90.75,43.75 90.75,41.3 U$10.6
N$111
  Top 0.203: R64.1 93.45,43.95 92.35,43.95 92.35,42.95 92.05,42.65 92.05,41.3 U$10.5
N$112
  Top 0.203: R65.2 89.15,45.9 T20.B
N$113
  Top 0.203: T20.E 87.25,45.9 87.25,48.05 SPKRPLUS9.TP
N$114
  Top 0.203: LED37.CATHODE 98.7,47.2 R67.1
N$115
  Top 0.203: LED38.CATHODE 98.2,32.4 R68.1
N$116
  Top 0.203: LED39.CATHODE 81.7,32 R69.1
N$117
  Top 0.203: LED40.CATHODE 81.6,42.8 R70.1
N$118
  Top 0.203: R64.2 93.6,42.15 93.6,40.7 T19.B
N$119  (via drill 0.61)
  Top 0.203: R69.2 84.75,35.35 84.75,40.65 R70.2 84.85,40.65 85.65,41.45 v86.85,41.45 | R68.2 97.75,37.8 T19.C 95.9,39.8 95.9,41.45 | 95.9,41.45 R67.2 | v95.8,41.45 95.9,41.45
  Bottom 0.203: v86.85,41.45 v95.8,41.45
N$120  (via drill 0.61)
  Top 0.203: v86.35,36.65 86.35,37.95 R66.1 | v90.6,36.65 90.6,34.65 90.7,34.55 U$10.3
  Bottom 0.203: SENSOR9.TP 83.05,38 85,38 v86.35,36.65 v90.6,36.65